# Altium PCB hiiri627v07.PcbDoc (part 2 of 3)
Units mm, origin at the board's own origin, x right, y up, seen from the top; angles counter-clockwise.
Board outline 78.49 x 90.04 mm, 2 copper layers (Top, Bottom); 69 components, 154 nets, 484 pads, 208 vias.
Unrouted connection lines stored in the file: 5.
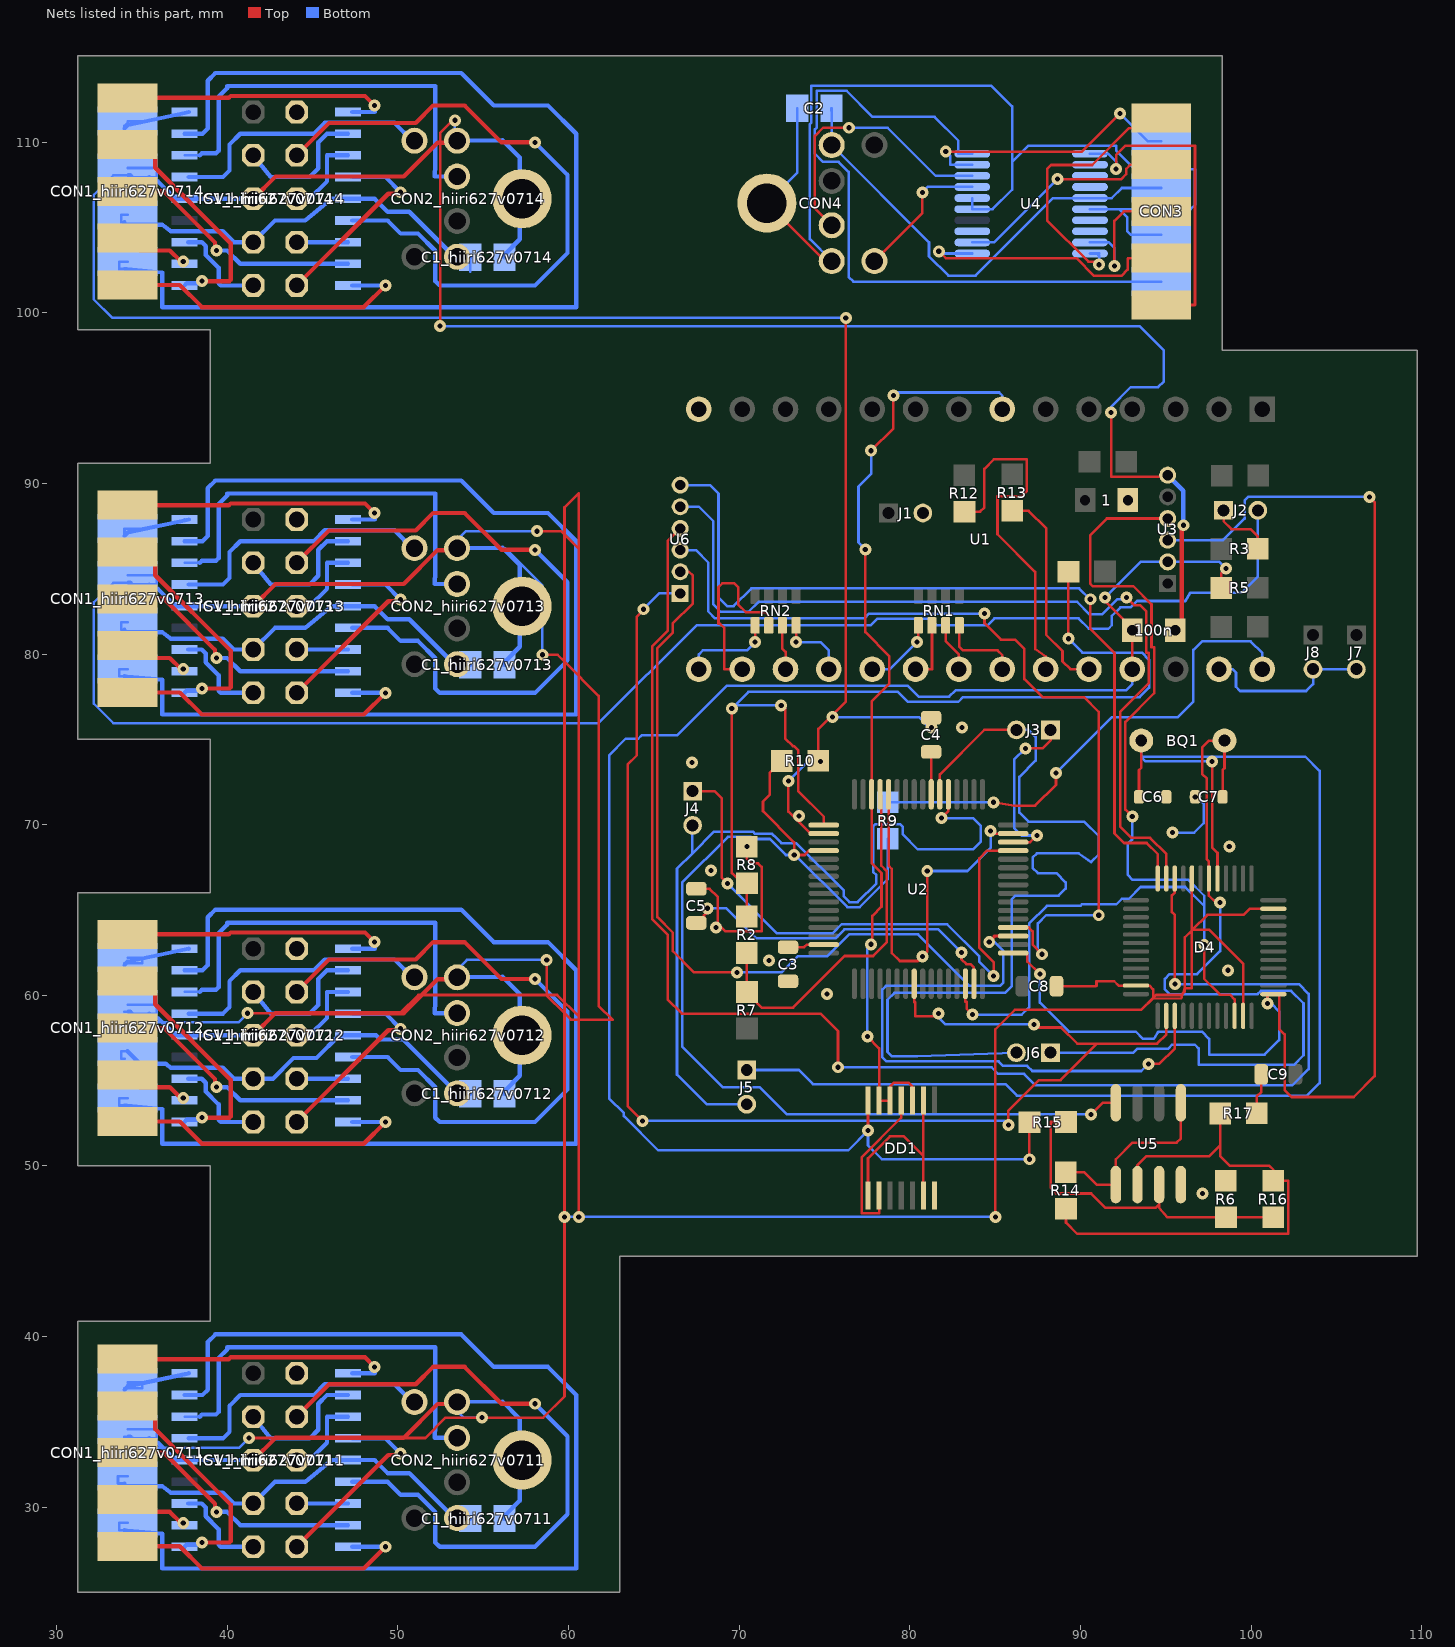
[diagram p2: the nets of this part, all layers, seen from the top]

## Via types
v1: diameter 0.7, hole 0.3, Top to Bottom, tented both sides, 208 vias

## Nets (pads, with @x,y where several pads share a name; then routed paths per layer and width w, separated by ;. In a path a pad name is that pad's centre, name@x,y a point inside that pad or via, vN(x,y) a via of type N, cw(c..) or ccw(c..) an arc to the next point about the centre after c; other vN are vias at no path point) (continued)
GND: 1.1 100n.2 C1_hiiri627v0711.2 C1_hiiri627v0712.2 C1_hiiri627v0713.2 C1_hiiri627v0714.2 C2.2 C3.2 C4.1 C5.2 C6.2 C7.2 C8.2 CON1_hiiri627v0711.8 CON1_hiiri627v0712.8 CON1_hiiri627v0713.8 CON1_hiiri627v0714.8 CON2_hiiri627v0711.3 CON2_hiiri627v0711.G CON2_hiiri627v0712.3 CON2_hiiri627v0712.G CON2_hiiri627v0713.3 CON2_hiiri627v0713.G CON2_hiiri627v0714.3 CON2_hiiri627v0714.G CON3.8 CON4.3 CON4.G D4.8 D4.23 D4.35 D4.47 DD1.7 IC1_hiiri627v0711.5 IC1_hiiri627v0712.5 IC1_hiiri627v0713.5 IC1_hiiri627v0714.5 J1.2 J2.2 R6.2 R8.1 R10.2 SV1_hiiri627v0711.6 SV1_hiiri627v0712.6 SV1_hiiri627v0713.6 SV1_hiiri627v0714.6 U1.14 U2.12 U2.18 U2.63 U3.6 U4.5 U4.6 U4.16 U5.4 | length 801.2
  Top w0.15: v1(41.199,58.953) 50.14,58.953 51.206,60.02 59.334,60.02 60.604,58.75 ; v1(41.275,34.061) 51.613,34.061 52.807,35.255 v1(54.94,35.255) 58.522,35.255 59.766,36.5 ; v1(52.476,99.212) 52.476,109.968 52.476,110.541 53.213,111.277 v1(53.349,111.277) ; v1(58.166,87.198) 59.563,87.198 60.604,86.157 ; v1(58.471,79.959) 59.36,79.959 59.766,79.553 ; v1(58.725,62.078) 58.725,59.995 59.766,58.953 ; v1(59.766,47.015) 59.766,36.5 ; v1(60.604,47.015) 60.604,58.75 ; C5.2@67.495,66.243 68.275,66.243 68.737,65.781 68.737,64.211 69.194,63.754 71.323,63.754 71.323,67.528 71.12,67.731 70.714,67.731 70.453,67.992 v1(70.453,68.714) ; CON4.G@71.628,106.426 75.028,103.026 CON4.3@75.428,103.026 ; v1(72.885,72.568) 72.885,70.771 74.18,69.477 U2.18@74.96,69.477 ; R10.2@74.644,73.742 74.644,75.609 v1@75.475,76.44 ; v1(75.475,76.302) v1@75.475,76.44 ; v1(76.251,99.695) 76.251,77.216 v1@75.475,76.44 ; U2.12@78.76,71.777 78.76,67.598 78.945,67.413 78.945,62.482 79.416,62.011 80.476,62.011 v1(80.747,62.281) 81.026,62.56 v1(81.026,67.285) ; C4.1@81.248,76.266 81.28,76.235 v1(81.28,75.692) ; v1(84.734,69.621) 84.734,69.477 U2.63@86.06,69.477 ; v1(85.014,47.015) 85.014,58.014 86.157,59.157 93.574,59.157 ; C8.2@88.598,60.534 90.907,60.534 90.943,60.571 90.943,60.825 91.983,60.825 92.238,60.571 D4.23@93.257,60.571 94.039,60.571 94.259,60.35 94.259,59.842 ; v1(91.796,94.158) 91.796,90.399 95.113,90.399 U3.6@95.113,90.482 ; D4.8@96.532,66.845 96.526,63.811 ; D4.35@99.532,58.796 99.532,61.86 97.536,63.856 96.571,63.856 ; D4.47@101.307,65.07 99.919,65.07 99.568,64.719 97.434,64.719 96.571,63.856 ; 59.766,36.5 59.766,58.953 ; 59.766,58.953 59.766,79.553 ; 59.766,58.953 60.147,58.572 62.586,58.572 61.773,59.385 61.773,77.546 59.766,79.553 ; 59.766,79.553 59.766,88.595 60.604,89.433 60.604,86.157 ; 60.604,58.75 60.604,86.157 ; 93.574,59.157 94.259,59.842 ; 93.574,59.157 94.246,59.804 ; 94.246,59.804 94.259,59.817 94.259,59.842 ; 94.246,59.804 95.91,59.817 96.012,60.122 ; 94.259,59.842 94.437,60.02 95.91,60.02 96.012,60.122 ; 96.012,60.122 96.114,60.427 ; 96.012,60.122 96.114,60.223 96.114,60.427 ; 96.114,60.427 96.114,63.398 96.526,63.811 ; 96.114,60.427 96.52,60.427 96.526,63.811 ; 96.526,63.811 96.571,63.856
  Top w0.254: SV1_hiiri627v0711.6@41.529,32.766 42.829,34.066 50.345,34.066 52.333,36.054 53.363,36.054 CON2_hiiri627v0711.3@53.476,36.166 ; SV1_hiiri627v0712.6@41.529,57.658 42.829,58.958 50.345,58.958 52.333,60.946 53.363,60.946 CON2_hiiri627v0712.3@53.476,61.058 ; SV1_hiiri627v0713.6@41.529,82.804 42.829,84.104 50.345,84.104 52.333,86.092 53.363,86.092 CON2_hiiri627v0713.3@53.476,86.204 ; SV1_hiiri627v0714.6@41.529,106.68 42.829,107.98 50.345,107.98 52.333,109.968 52.476,109.968 53.363,109.968 CON2_hiiri627v0714.3@53.476,110.08 ; 100n.2@95.555,81.397 95.936,81.778 95.936,87.451 v1(96.031,87.547)
  Bottom w0.15: CON1_hiiri627v0712.8@33.985,59.03 34.164,59.03 CON1_hiiri627v0712.8@34.214,59.03 ; CON1_hiiri627v0711.8@34.164,34.569 35.865,34.569 35.865,34.036 35.433,34.036 34.417,34.036 34.315,34.036 34.214,34.138 34.164,34.138 33.985,34.138 33.985,33.909 34.417,33.477 40.691,33.477 v1(41.275,34.061) ; CON1_hiiri627v0712.8@34.164,59.461 35.865,59.461 35.865,58.928 35.433,58.928 34.417,58.928 34.315,58.928 CON1_hiiri627v0712.8@34.214,59.03 ; CON1_hiiri627v0713.8@34.164,84.607 35.865,84.607 35.865,84.074 35.433,84.074 34.417,84.074 34.315,84.074 34.214,84.176 34.164,84.176 33.985,84.176 33.325,84.176 32.182,83.033 32.182,77.089 33.325,75.946 61.773,75.946 67.511,81.685 77.711,81.685 78.098,82.072 81.204,82.072 81.591,81.685 84.555,81.685 84.963,82.093 89.887,82.093 90.496,81.483 91.634,81.483 91.837,81.686 91.837,82.237 92.338,82.737 92.948,82.737 93.318,83.107 96.138,83.107 96.429,83.603 99.467,83.603 100.395,84.531 J2.2@100.395,88.422 ; CON1_hiiri627v0714.8@34.164,108.483 35.865,108.483 35.865,107.95 35.433,107.95 34.417,107.95 34.315,107.95 34.214,108.052 34.164,108.052 33.985,108.052 33.325,108.052 32.182,106.909 32.182,100.787 33.274,99.695 v1(76.251,99.695) ; v1(41.199,58.953) 40.665,58.42 34.823,58.42 34.4,58.928 34.315,59.03 CON1_hiiri627v0712.8@34.214,59.03 ; v1(52.476,99.212) 93.472,99.212 94.885,97.799 94.885,95.976 94.548,95.639 92.95,95.639 91.796,94.485 v1(91.796,94.158) ; CON2_hiiri627v0711.3@53.349,36.166 53.349,35.763 53.857,35.255 v1(54.94,35.255) ; CON2_hiiri627v0712.3@53.349,61.058 53.349,61.375 54.051,62.078 v1(58.725,62.078) ; CON2_hiiri627v0714.3@53.349,110.08 v1(53.349,111.277) ; v1(58.166,87.198) 53.984,87.198 53.349,86.563 53.349,86.204 CON2_hiiri627v0713.3@53.476,86.204 53.877,86.204 56.163,86.204 56.29,86.204 58.471,84.023 v1(58.471,79.959) ; v1(59.766,47.015) v1(60.604,47.015) v1(85.014,47.015) ; CON4.G@71.628,106.426 73.412,108.21 C2.2@73.412,111.984 ; v1(72.885,72.568) 74.028,73.711 v1(74.778,73.711) ; CON4.3@75.428,103.026 74.141,104.313 74.141,111.052 74.237,111.148 74.237,113.309 84.771,113.309 85.994,112.086 85.994,108.834 ; v1(75.475,76.302) 80.53,76.302 81.14,75.692 v1(81.28,75.692) ; v1(81.026,67.285) 83.381,67.285 84.734,68.638 v1(84.734,69.621) ; U4.6@83.662,106.721 83.658,106.721 83.658,106.071 U4.5@83.662,106.071 84.857,106.071 85.994,107.209 85.994,108.834 ; U4.16@90.562,106.071 92.263,106.071 ; CON3.8@94.732,104.567 92.954,104.567 92.751,104.77 92.751,105.583 92.263,106.071 ; v1(95.405,69.54) 96.67,69.54 97.228,70.099 97.228,71.226 96.826,71.628 v1(96.732,71.628) ; 85.994,108.834 86.934,109.774 92.097,109.774 92.097,109.514 93.208,108.403 96.713,108.403 96.713,106.325 96.459,106.071 92.263,106.071
  Bottom w0.254: CON1_hiiri627v0711.8@34.214,34.138 34.315,34.138 CON1_hiiri627v0711.8@34.417,34.036 ; CON1_hiiri627v0712.8@34.214,59.03 34.315,59.03 CON1_hiiri627v0712.8@34.417,58.928 ; CON1_hiiri627v0713.8@34.214,84.176 34.315,84.176 CON1_hiiri627v0713.8@34.417,84.074 ; CON1_hiiri627v0714.8@34.214,108.052 34.315,108.052 CON1_hiiri627v0714.8@34.417,107.95 ; CON1_hiiri627v0711.8@35.433,34.036 35.687,33.782 35.941,33.782 36.957,32.766 IC1_hiiri627v0711.5@37.503,32.766 SV1_hiiri627v0711.6@41.529,32.766 ; CON1_hiiri627v0712.8@35.433,58.928 35.687,58.674 35.941,58.674 36.957,57.658 IC1_hiiri627v0712.5@37.503,57.658 SV1_hiiri627v0712.6@41.529,57.658 ; CON1_hiiri627v0713.8@35.433,84.074 35.687,83.82 35.941,83.82 36.957,82.804 IC1_hiiri627v0713.5@37.503,82.804 SV1_hiiri627v0713.6@41.529,82.804 ; CON1_hiiri627v0714.8@35.433,107.95 35.687,107.696 35.941,107.696 36.957,106.68 IC1_hiiri627v0714.5@37.503,106.68 SV1_hiiri627v0714.6@41.529,106.68 ; CON2_hiiri627v0711.3@53.349,36.166 CON2_hiiri627v0711.3@53.476,36.166 53.877,36.166 56.134,36.195 57.149,35.18 57.149,30.391 56.245,29.487 C1_hiiri627v0711.2@56.245,29.337 ; CON2_hiiri627v0712.3@53.349,61.058 CON2_hiiri627v0712.3@53.476,61.058 53.877,61.058 56.134,61.087 57.149,60.072 57.149,55.283 56.245,54.379 C1_hiiri627v0712.2@56.245,54.229 ; CON2_hiiri627v0714.3@53.349,110.08 CON2_hiiri627v0714.3@53.476,110.08 53.877,110.08 56.134,110.109 57.149,109.094 57.149,104.305 56.245,103.401 C1_hiiri627v0714.2@56.245,103.251 ; CON2_hiiri627v0713.3@53.877,86.204 56.134,86.233 56.163,86.204 57.149,85.218 57.149,80.429 56.245,79.525 C1_hiiri627v0713.2@56.245,79.375 ; U3.6@95.113,90.482 96.031,89.563 v1(96.031,87.547)
  other v1: 97.159,48.387 75.144,60.07 98.65,61.467 71.762,62.036 68.656,63.977 68.363,67.305 98.725,68.728 73.507,70.51 67.248,73.645 83.058,75.692
H: CON3.2 U4.2 | length 13.1
  Top w0.15: v1(88.647,107.83) 92.395,107.83 92.687,108.122 92.687,108.428 92.941,108.682 CON3.2@94.732,108.682
  Bottom w0.15: U4.2@83.662,104.121 84.937,104.121 v1(88.647,107.83)
H_hiiri627v0711: CON1_hiiri627v0711.2 IC1_hiiri627v0711.2 | length 5
  Top w0.15: CON1_hiiri627v0711.2@33.985,30.023 33.985,30.454 CON1_hiiri627v0711.2@34.163,30.454
  Top w0.254: CON1_hiiri627v0711.2@33.985,30.023 CON1_hiiri627v0711.2@34.366,30.023 ; CON1_hiiri627v0711.2@34.163,30.454 34.886,29.731 36.638,29.731 37.287,29.083 v1(37.427,29.083)
  Bottom w0.254: v1(37.427,29.083) 37.503,29.007 IC1_hiiri627v0711.2@37.503,28.956 IC1_hiiri627v0711.2@37.465,28.956
H_hiiri627v0712: CON1_hiiri627v0712.2 IC1_hiiri627v0712.2 | length 5
  Top w0.15: CON1_hiiri627v0712.2@33.985,54.915 33.985,55.346 CON1_hiiri627v0712.2@34.163,55.346
  Top w0.254: CON1_hiiri627v0712.2@33.985,54.915 CON1_hiiri627v0712.2@34.366,54.915 ; CON1_hiiri627v0712.2@34.163,55.346 34.886,54.623 36.638,54.623 37.287,53.975 v1(37.427,53.975)
  Bottom w0.254: v1(37.427,53.975) 37.503,53.899 IC1_hiiri627v0712.2@37.503,53.848 IC1_hiiri627v0712.2@37.465,53.848
H_hiiri627v0713: CON1_hiiri627v0713.2 IC1_hiiri627v0713.2 | length 5
  Top w0.15: CON1_hiiri627v0713.2@33.985,80.061 33.985,80.492 CON1_hiiri627v0713.2@34.163,80.492
  Top w0.254: CON1_hiiri627v0713.2@33.985,80.061 CON1_hiiri627v0713.2@34.366,80.061 ; CON1_hiiri627v0713.2@34.163,80.492 34.886,79.769 36.638,79.769 37.287,79.121 v1(37.427,79.121)
  Bottom w0.254: v1(37.427,79.121) 37.503,79.045 IC1_hiiri627v0713.2@37.503,78.994 IC1_hiiri627v0713.2@37.465,78.994
H_hiiri627v0714: CON1_hiiri627v0714.2 IC1_hiiri627v0714.2 | length 5
  Top w0.15: CON1_hiiri627v0714.2@33.985,103.937 33.985,104.368 CON1_hiiri627v0714.2@34.163,104.368
  Top w0.254: CON1_hiiri627v0714.2@33.985,103.937 CON1_hiiri627v0714.2@34.366,103.937 ; CON1_hiiri627v0714.2@34.163,104.368 34.886,103.645 36.638,103.645 37.287,102.997 v1(37.427,102.997)
  Bottom w0.254: v1(37.427,102.997) 37.503,102.921 IC1_hiiri627v0714.2@37.503,102.87 IC1_hiiri627v0714.2@37.465,102.87
HQ: CON3.4 U4.1 | length 16.4
  Top w0.15: v1(81.702,103.602) 82.109,103.195 89.769,103.195 90.801,102.163 92.395,102.163 92.767,102.535 92.767,103.161 92.802,103.195 CON3.4@94.732,103.195
  Bottom w0.15: v1(81.702,103.602) 81.833,103.471 U4.1@83.662,103.471
HQ_hiiri627v0711: CON1_hiiri627v0711.4 IC1_hiiri627v0711.1 | length 13.8
  Top w0.254: CON1_hiiri627v0711.4@34.163,35.941 35.063,35.941 35.786,35.218 35.786,34.581 40.203,30.165 40.203,28.011 40.132,27.94 v1(38.519,27.94)
  Bottom w0.254: IC1_hiiri627v0711.1@37.503,27.686 37.63,27.813 38.392,27.813 v1(38.519,27.94)
HQ_hiiri627v0712: CON1_hiiri627v0712.4 IC1_hiiri627v0712.1 | length 13.8
  Top w0.254: CON1_hiiri627v0712.4@34.163,60.833 35.063,60.833 35.786,60.11 35.786,59.473 40.203,55.057 40.203,52.903 40.132,52.832 v1(38.519,52.832)
  Bottom w0.254: IC1_hiiri627v0712.1@37.503,52.578 37.63,52.705 38.392,52.705 v1(38.519,52.832)
HQ_hiiri627v0713: CON1_hiiri627v0713.4 IC1_hiiri627v0713.1 | length 13.8
  Top w0.254: CON1_hiiri627v0713.4@34.163,85.979 35.063,85.979 35.786,85.256 35.786,84.619 40.203,80.203 40.203,78.049 40.132,77.978 v1(38.519,77.978)
  Bottom w0.254: IC1_hiiri627v0713.1@37.503,77.724 37.63,77.851 38.392,77.851 v1(38.519,77.978)
HQ_hiiri627v0714: CON1_hiiri627v0714.4 IC1_hiiri627v0714.1 | length 13.8
  Top w0.254: CON1_hiiri627v0714.4@34.163,109.855 35.063,109.855 35.786,109.132 35.786,108.495 40.203,104.079 40.203,101.925 40.132,101.854 v1(38.519,101.854)
  Bottom w0.254: IC1_hiiri627v0714.1@37.503,101.6 37.63,101.727 38.392,101.727 v1(38.519,101.854)
LEFTMB/FIRE: CON3.6 U4.9 | length 16.4
  Top w0.15: v1(82.108,109.444) 90.084,109.444 v1(92.319,111.679)
  Bottom w0.15: v1(82.108,109.444) 82.362,109.19 82.362,108.671 U4.9@83.662,108.671 ; v1(92.319,111.679) 93.945,110.053 CON3.6@94.732,110.053
LEFTMB/FIRE_hiiri627v0711: CON1_hiiri627v0711.6 IC1_hiiri627v0711.8 | length 67.4
  Bottom w0.15: CON1_hiiri627v0711.6@33.985,28.651 33.68,28.651 33.68,29.083 CON1_hiiri627v0711.6@34.164,29.083
  Bottom w0.254: CON1_hiiri627v0711.6@33.985,28.651 34.123,28.639 36.195,28.448 36.195,26.416 60.452,26.416 60.452,36.576 58.801,38.227 55.626,38.227 53.721,40.132 39.31,40.132 38.862,39.684 38.862,36.881 38.557,36.576 IC1_hiiri627v0711.8@37.503,36.576
LEFTMB/FIRE_hiiri627v0712: CON1_hiiri627v0712.6 IC1_hiiri627v0712.8 | length 67.4
  Bottom w0.15: CON1_hiiri627v0712.6@33.985,53.543 33.68,53.543 33.68,53.975 CON1_hiiri627v0712.6@34.164,53.975
  Bottom w0.254: CON1_hiiri627v0712.6@33.985,53.543 34.123,53.531 36.195,53.34 36.195,51.308 60.452,51.308 60.452,61.468 58.801,63.119 55.626,63.119 53.721,65.024 39.31,65.024 38.862,64.576 38.862,61.773 38.557,61.468 IC1_hiiri627v0712.8@37.503,61.468
LEFTMB/FIRE_hiiri627v0713: CON1_hiiri627v0713.6 IC1_hiiri627v0713.8 | length 67.4
  Bottom w0.15: CON1_hiiri627v0713.6@33.985,78.689 33.68,78.689 33.68,79.121 CON1_hiiri627v0713.6@34.164,79.121
  Bottom w0.254: CON1_hiiri627v0713.6@33.985,78.689 34.123,78.677 36.195,78.486 36.195,76.454 60.452,76.454 60.452,86.614 58.801,88.265 55.626,88.265 53.721,90.17 39.31,90.17 38.862,89.722 38.862,86.919 38.557,86.614 IC1_hiiri627v0713.8@37.503,86.614
LEFTMB/FIRE_hiiri627v0714: CON1_hiiri627v0714.6 IC1_hiiri627v0714.8 | length 67.4
  Bottom w0.15: CON1_hiiri627v0714.6@33.985,102.565 33.68,102.565 33.68,102.997 CON1_hiiri627v0714.6@34.164,102.997
  Bottom w0.254: CON1_hiiri627v0714.6@33.985,102.565 34.123,102.553 36.195,102.362 36.195,100.33 60.452,100.33 60.452,110.49 58.801,112.141 55.626,112.141 53.721,114.046 39.31,114.046 38.862,113.598 38.862,110.795 38.557,110.49 IC1_hiiri627v0714.8@37.503,110.49
LMBFIRE2: U4.3
LMBFIRE2_hiiri627v0711: IC1_hiiri627v0711.3 SV1_hiiri627v0711.2 | length 5.7
  Bottom w0.254: IC1_hiiri627v0711.3@37.719,30.226 38.508,30.226 38.743,29.991 38.743,29.471 39.497,28.717 39.497,27.813 39.624,27.686 SV1_hiiri627v0711.2@41.529,27.686
LMBFIRE2_hiiri627v0712: IC1_hiiri627v0712.3 SV1_hiiri627v0712.2 | length 5.7
  Bottom w0.254: IC1_hiiri627v0712.3@37.719,55.118 38.508,55.118 38.743,54.883 38.743,54.363 39.497,53.609 39.497,52.705 39.624,52.578 SV1_hiiri627v0712.2@41.529,52.578
LMBFIRE2_hiiri627v0713: IC1_hiiri627v0713.3 SV1_hiiri627v0713.2 | length 5.7
  Bottom w0.254: IC1_hiiri627v0713.3@37.719,80.264 38.508,80.264 38.743,80.029 38.743,79.509 39.497,78.755 39.497,77.851 39.624,77.724 SV1_hiiri627v0713.2@41.529,77.724
LMBFIRE2_hiiri627v0714: IC1_hiiri627v0714.3 SV1_hiiri627v0714.2 | length 5.7
  Bottom w0.254: IC1_hiiri627v0714.3@37.719,104.14 38.508,104.14 38.743,103.905 38.743,103.385 39.497,102.631 39.497,101.727 39.624,101.6 SV1_hiiri627v0714.2@41.529,101.6
MIDDLEMB/POTX: CON3.5 U4.11 | length 19.1
  Top w0.15: v1(92.09,108.428) 92.09,109.241 92.624,109.774 96.713,109.774 96.713,100.452 CON3.5@94.732,100.452
  Bottom w0.15: U4.11@90.562,109.321 91.629,109.321 92.09,108.86 v1(92.09,108.428)
MIDDLEMB/POTX_hiiri627v0711: CON1_hiiri627v0711.5 IC1_hiiri627v0711.10 | length 16.4
  Top w0.254: CON1_hiiri627v0711.5@34.163,38.684 40.099,38.684 40.203,38.787 48.081,38.787 v1(48.641,38.227)
  Bottom w0.254: IC1_hiiri627v0711.10@47.333,37.846 48.641,37.846 v1(48.641,38.227)
MIDDLEMB/POTX_hiiri627v0712: CON1_hiiri627v0712.5 IC1_hiiri627v0712.10 | length 16.4
  Top w0.254: CON1_hiiri627v0712.5@34.163,63.576 40.099,63.576 40.203,63.679 48.081,63.679 v1(48.641,63.119)
  Bottom w0.254: IC1_hiiri627v0712.10@47.333,62.738 48.641,62.738 v1(48.641,63.119)
MIDDLEMB/POTX_hiiri627v0713: CON1_hiiri627v0713.5 IC1_hiiri627v0713.10 | length 16.4
  Top w0.254: CON1_hiiri627v0713.5@34.163,88.722 40.099,88.722 40.203,88.825 48.081,88.825 v1(48.641,88.265)
  Bottom w0.254: IC1_hiiri627v0713.10@47.333,87.884 48.641,87.884 v1(48.641,88.265)
MIDDLEMB/POTX_hiiri627v0714: CON1_hiiri627v0714.5 IC1_hiiri627v0714.10 | length 16.4
  Top w0.254: CON1_hiiri627v0714.5@34.163,112.598 40.099,112.598 40.203,112.701 48.081,112.701 v1(48.641,112.141)
  Bottom w0.254: IC1_hiiri627v0714.10@47.333,111.76 48.641,111.76 v1(48.641,112.141)
Net_2: ?.2 R2.2 R8.2 U2.17 | length 60.1
  Top w0.15: v1(69.571,76.808) 69.571,67.171 69.899,66.843 69.899,66.572 R8.2@70.459,66.572 70.459,64.619 R2.2@70.447,64.619 ; v1(72.466,76.987) 72.695,76.987 72.695,75.057 73.152,74.6 73.227,74.6 73.46,74.367 73.46,71.969 74.96,70.469 U2.17@74.96,69.977 ; v1(89.298,80.899) ?.2@89.298,84.83
  Bottom w0.15: v1(69.571,76.808) v1@69.75,76.987 ; v1(72.466,76.987) v1@69.75,76.987 ; v1(89.298,80.899) 90.111,80.086 93.599,80.086 94.031,79.654 94.031,78.029 93.472,77.47 83.109,77.47 82.84,77.202 79.885,77.202 79.301,77.785 70.548,77.785 v1@69.75,76.987
NetC3_1: C3.1 U2.31 | length 2.2
  Top w0.15: C3.1@72.866,62.82 73.812,62.82 73.969,62.977 U2.31@74.96,62.977
NetC4_2: C4.2 U2.7 | length 2.5
  Top w0.15: C4.2@81.248,74.267 81.248,73.011 81.26,73 U2.7@81.26,71.777
NetC5_1: C5.1 U2.47 | length 19.9
  Top w0.15: C5.1@67.495,64.243 67.627,64.243 67.943,64.558 67.943,64.691 68.043,64.791 68.043,64.995 v1(68.148,65.1) ; v1(83.033,62.509) 83.033,62.103 83.312,61.824 83.566,61.824 83.76,61.63 U2.47@83.76,60.677
  Bottom w0.15: v1(68.148,65.1) 69.249,65.1 71.013,63.336 75.644,63.336 76.174,63.867 81.675,63.867 v1(83.033,62.509)
NetC9_1: C9.1 R17.1 | length 2.4
  Top w0.15: R17.1@100.33,53.086 100.33,54.077 100.6,54.347 C9.1@100.6,55.372
NetDD1_1: DD1.1 DD1.6 DD1.9 | length 12
  Top w0.15: DD1.1@77.552,48.279 77.552,50.45 78.842,51.74 79.654,51.74 80.802,50.592 ; DD1.6@80.802,48.279 80.802,50.592 ; DD1.9@80.802,53.829 80.802,50.592
NetDD1_2: DD1.2 DD1.11 | length 9.6
  Top w0.15: DD1.2@78.202,48.279 78.202,47.229 77.177,47.229 77.177,50.507 79.502,52.832 DD1.11@79.502,53.829
NetJ2_1: J2.1 R3.2 | length 3.7
  Top w0.15: J2.1@98.389,88.422 98.389,87.782 98.853,87.318 99.974,87.318 100.395,86.897 R3.2@100.395,86.164
NetJ3_1: J3.1 U2.62 | length 10.3
  Top w0.15: U2.62@86.06,68.977 87.062,68.977 v1(87.452,69.367) ; v1(86.785,74.473) 87.782,74.473 88.255,74.945 J3.1@88.255,75.555
  Bottom w0.15: v1(86.785,74.473) 86.12,73.807 86.12,69.811 86.563,69.367 v1(87.452,69.367)
NetJ3_2: J3.2 J6.2 U2.6 | length 53.6
  Top w0.15: U2.6@81.76,71.777 81.76,72.949 84.366,75.555 J3.2@86.248,75.555
  Bottom w0.15: J6.2@86.248,56.642 80.442,56.427 78.961,56.427 78.696,56.693 78.696,59.741 79.102,60.147 85.573,60.147 85.979,60.554 85.979,65.634 86.191,65.846 88.722,65.846 89.129,66.252 89.129,66.624 88.595,67.158 87.503,67.158 87.198,67.462 87.198,68.072 87.443,68.317 89.9,68.317 90.627,67.802 91.075,68.25 91.075,69.326 90.221,70.18 86.953,70.18 86.42,70.714 86.42,72.796 87.376,73.752 87.376,75.149 86.97,75.555 J3.2@86.248,75.555
NetJ4_1: J4.1 U2.61 | length 34.9
  Top w0.15: J4.1@67.278,71.964 68.548,71.964 68.986,71.526 68.986,66.878 v1(69.317,66.548) ; v1(84.912,61.138) 84.912,61.949 84.083,62.778 84.083,68.029 84.531,68.477 U2.61@86.06,68.477
  Bottom w0.15: v1(69.317,66.548) 72.228,63.636 75.475,63.636 76.005,64.167 82.188,64.167 84.083,62.272 84.083,61.967 v1(84.912,61.138)
NetJ4_2: J4.2 J5.2 U2.5 | length 49.3
  Top w0.15: v1(81.864,70.383) 81.864,70.402 82.26,70.798 U2.5@82.26,71.777
  Bottom w0.15: J4.2@67.278,69.958 67.259,69.958 67.259,68.325 ; J5.2@70.447,53.619 68.097,53.619 66.359,55.358 66.359,67.425 67.259,68.325 ; v1(81.864,70.383) 83.718,70.383 84.159,69.943 84.159,68.995 83.718,68.555 80.467,68.555 79.578,69.444 79.578,69.889 79.436,70.031 77.98,70.031 77.848,69.899 77.848,67.237 78.045,67.04 78.045,66.564 76.946,65.465 76.47,65.465 76.133,65.802 76.133,66.133 73.342,68.924 72.478,68.924 72.061,69.341 72.053,69.341 71.932,69.462 70.942,69.462 70.815,69.589 68.523,69.589 67.259,68.325
NetJ7_2: J7.2 J8.2 U1.27 | length 10.1
  Bottom w0.15: U1.27@98.12,79.111 98.918,79.111 99.117,78.911 99.117,78.084 99.365,77.836 103.226,77.836 103.632,78.242 J8.2@103.632,79.111 J7.2@106.172,79.111
NetR6_1: R6.1 R15.2 R16.1 U5.3 | length 20
  Top w0.15: R15.2@89.154,52.578 88.265,52.578 88.265,48.717 88.595,48.387 90.627,48.387 91.465,47.549 94.412,47.549 94.615,47.752 ; U5.3@94.615,48.908 94.615,47.752 ; R16.1@101.307,46.99 R6.1@98.532,46.99 95.098,46.99 94.615,47.549 94.615,47.752
NetR9_1: R9.1 U1.28 | length 29.4
  Top w0.15: v1(84.912,71.313) 86.131,71.12 87.351,71.12 88.57,72.339 v1(88.57,73.025)
  Bottom w0.15: R9.1@78.714,71.313 v1(84.912,71.313) ; v1(88.57,73.025) 91.846,76.302 95.707,76.302 96.622,77.216 96.622,80.239 97.13,80.747 99.974,80.747 100.66,80.061 U1.28@100.66,79.111
NetR14_1: R14.1 R16.2 R17.2 U5.2 | length 31.2
  Top w0.15: R14.1@89.154,47.498 89.154,46.685 89.814,46.025 102.184,46.025 102.184,49.132 R16.2@101.301,49.132 101.301,49.784 101.072,50.013 98.755,50.013 98.188,50.58 98.188,51.206 ; U5.2@93.345,48.908 93.345,50.047 93.878,50.581 97.562,50.581 98.188,51.206 ; R17.2@98.188,53.08 98.188,51.206
NetR14_2: R14.2 U5.1 U5.5 | length 11.1
  Top w0.15: R14.2@89.148,49.64 90.221,49.64 90.953,48.908 U5.1@92.075,48.908 92.075,50.394 93.049,51.368 95.64,51.368 95.885,51.613 U5.5@95.885,53.708
OSC1: U4.18
OSC1_hiiri627v0711: IC1_hiiri627v0711.16 SV1_hiiri627v0711.3 | length 3
  Bottom w0.254: SV1_hiiri627v0711.3@44.069,30.226 IC1_hiiri627v0711.16@47.079,30.226
OSC1_hiiri627v0712: IC1_hiiri627v0712.16 SV1_hiiri627v0712.3 | length 3
  Bottom w0.254: SV1_hiiri627v0712.3@44.069,55.118 IC1_hiiri627v0712.16@47.079,55.118
OSC1_hiiri627v0713: IC1_hiiri627v0713.16 SV1_hiiri627v0713.3 | length 3
  Bottom w0.254: SV1_hiiri627v0713.3@44.069,80.264 IC1_hiiri627v0713.16@47.079,80.264
OSC1_hiiri627v0714: IC1_hiiri627v0714.16 SV1_hiiri627v0714.3 | length 3
  Bottom w0.254: SV1_hiiri627v0714.3@44.069,104.14 IC1_hiiri627v0714.16@47.079,104.14
OSC2: U4.17
OSC2_hiiri627v0711: IC1_hiiri627v0711.15 SV1_hiiri627v0711.7 | length 39.4
  Top w0.254: SV1_hiiri627v0711.7@44.069,35.306 45.968,37.205 51.048,37.205 52.07,38.227 53.915,38.227 56.074,36.068 v1(58.039,36.068)
  Bottom w0.254: IC1_hiiri627v0711.15@47.333,31.496 49.403,31.496 50.165,30.734 51.181,30.734 52.197,29.718 52.197,27.94 52.451,27.686 58.039,27.686 59.944,29.591 59.944,34.163 v1(58.039,36.068)
OSC2_hiiri627v0712: IC1_hiiri627v0712.15 SV1_hiiri627v0712.7 | length 39.4
  Top w0.254: SV1_hiiri627v0712.7@44.069,60.198 45.968,62.097 51.048,62.097 52.07,63.119 53.915,63.119 56.074,60.96 v1(58.039,60.96)
  Bottom w0.254: IC1_hiiri627v0712.15@47.333,56.388 49.403,56.388 50.165,55.626 51.181,55.626 52.197,54.61 52.197,52.832 52.451,52.578 58.039,52.578 59.944,54.483 59.944,59.055 v1(58.039,60.96)
OSC2_hiiri627v0713: IC1_hiiri627v0713.15 SV1_hiiri627v0713.7 | length 39.4
  Top w0.254: SV1_hiiri627v0713.7@44.069,85.344 45.968,87.243 51.048,87.243 52.07,88.265 53.915,88.265 56.074,86.106 v1(58.039,86.106)
  Bottom w0.254: IC1_hiiri627v0713.15@47.333,81.534 49.403,81.534 50.165,80.772 51.181,80.772 52.197,79.756 52.197,77.978 52.451,77.724 58.039,77.724 59.944,79.629 59.944,84.201 v1(58.039,86.106)
OSC2_hiiri627v0714: IC1_hiiri627v0714.15 SV1_hiiri627v0714.7 | length 39.4
  Top w0.254: SV1_hiiri627v0714.7@44.069,109.22 45.968,111.119 51.048,111.119 52.07,112.141 53.915,112.141 56.074,109.982 v1(58.039,109.982)
  Bottom w0.254: IC1_hiiri627v0714.15@47.333,105.41 49.403,105.41 50.165,104.648 51.181,104.648 52.197,103.632 52.197,101.854 52.451,101.6 58.039,101.6 59.944,103.505 59.944,108.077 v1(58.039,109.982)
OSC_I: BQ1.1 C6.1 D4.5 J5.1 | length 79.2
  Top w0.15: C6.1@93.434,71.628 93.434,73.203 93.565,73.333 BQ1.1@93.565,74.93 ; v1(97.714,73.711) 97.714,68.67 98.032,68.351 D4.5@98.032,66.845
  Bottom w0.15: J5.1@70.447,55.626 73.496,55.626 74.32,54.802 85.599,54.802 86.28,54.121 103.27,54.121 104.013,54.864 104.013,73.152 103.175,73.99 93.565,73.99 ; BQ1.1@93.565,74.93 93.565,73.99 ; v1(97.714,73.711) 93.819,73.711 93.565,73.965 93.565,73.99
OSC_O: BQ1.2 C7.1 D4.6 J6.1 | length 49.8
  Top w0.15: v1(98.185,65.43) 97.938,65.43 97.532,65.837 D4.6@97.532,66.845 97.532,67.843 97.409,67.966 97.409,72.695 97.13,72.974 97.13,74.524 97.536,74.93 BQ1.2@98.445,74.93 98.445,73.315 98.332,73.203 C7.1@98.332,71.628
  Bottom w0.15: J6.1@88.255,56.642 93.105,56.642 93.327,56.864 95.123,56.864 95.364,57.105 96.713,57.105 96.922,56.896 96.922,55.924 102.506,55.924 103.071,56.49 103.071,59.538 102.343,60.266 100.581,60.266 100.386,60.071 95.225,60.071 94.945,60.35 94.945,60.96 95.225,61.239 96.839,61.239 98.185,62.586 v1(98.185,65.43)
POTX: R13.1 U1.24 | length 12.3
  Top w0.15: R13.1@86.006,88.392 86.97,88.392 87.986,87.376 87.986,81.131 88.951,80.166 88.951,79.568 89.408,79.111 U1.24@90.5,79.111
POTY: R12.1 U1.23 | length 21.3
  Top w0.15: R12.1@83.206,88.34 84.125,88.34 84.374,88.589 84.374,90.851 84.938,91.415 86.868,91.415 86.868,89.56 86.563,89.256 85.141,89.256 85.141,87.02 87.351,84.811 87.351,80.289 87.96,79.858 U1.23@87.96,79.111
PS2CLOCK: CON4.5 U4.7 | length 8.2
  Top w0.15: CON4.5@77.928,103.026 80.737,105.835 v1(80.737,107.056)
  Bottom w0.15: v1(80.737,107.056) 81.051,107.371 U4.7@83.662,107.371
PS2CLOCK_hiiri627v0711: CON2_hiiri627v0711.5 IC1_hiiri627v0711.6 | length 15.9
  Bottom w0.15: CON2_hiiri627v0711.5@50.849,36.244 50.849,36.166 CON2_hiiri627v0711.5@50.976,36.166
  Bottom w0.254: IC1_hiiri627v0711.6@37.757,34.036 39.751,34.036 40.132,34.417 40.132,35.941 40.767,36.576 45.085,36.576 45.72,37.211 49.804,37.211 CON2_hiiri627v0711.5@50.849,36.166
PS2CLOCK_hiiri627v0712: CON2_hiiri627v0712.5 IC1_hiiri627v0712.6 | length 15.9
  Bottom w0.15: CON2_hiiri627v0712.5@50.849,61.136 50.849,61.058 CON2_hiiri627v0712.5@50.976,61.058
  Bottom w0.254: IC1_hiiri627v0712.6@37.757,58.928 39.751,58.928 40.132,59.309 40.132,60.833 40.767,61.468 45.085,61.468 45.72,62.103 49.804,62.103 CON2_hiiri627v0712.5@50.849,61.058
PS2CLOCK_hiiri627v0713: CON2_hiiri627v0713.5 IC1_hiiri627v0713.6 | length 15.9
  Bottom w0.15: CON2_hiiri627v0713.5@50.849,86.282 50.849,86.204 CON2_hiiri627v0713.5@50.976,86.204
  Bottom w0.254: IC1_hiiri627v0713.6@37.757,84.074 39.751,84.074 40.132,84.455 40.132,85.979 40.767,86.614 45.085,86.614 45.72,87.249 49.804,87.249 CON2_hiiri627v0713.5@50.849,86.204
PS2CLOCK_hiiri627v0714: CON2_hiiri627v0714.5 IC1_hiiri627v0714.6 | length 15.9
  Bottom w0.15: CON2_hiiri627v0714.5@50.849,110.158 50.849,110.08 CON2_hiiri627v0714.5@50.976,110.08
  Bottom w0.254: IC1_hiiri627v0714.6@37.757,107.95 39.751,107.95 40.132,108.331 40.132,109.855 40.767,110.49 45.085,110.49 45.72,111.125 49.804,111.125 CON2_hiiri627v0714.5@50.849,110.08
PS2DATA: CON4.1 U4.8 | length 16.2
  Top w0.15: CON4.1@75.428,105.126 74.437,106.117 74.437,110.358 74.92,110.841 v1(76.444,110.841)
  Bottom w0.15: v1(76.444,110.841) 78.704,110.841 81.524,108.021 U4.8@83.662,108.021
PS2DATA_hiiri627v0711: CON2_hiiri627v0711.1 IC1_hiiri627v0711.7 | length 24.9
  Bottom w0.15: IC1_hiiri627v0711.7@37.503,35.306 38.392,35.306 ; CON2_hiiri627v0711.1@53.349,34.066 CON2_hiiri627v0711.1@53.476,34.066
  Bottom w0.254: 38.392,35.306 38.519,35.433 39.348,35.433 39.497,35.582 39.497,38.743 40.005,39.251 40.005,39.37 52.197,39.37 52.197,34.798 52.167,34.066 CON2_hiiri627v0711.1@53.349,34.066
PS2DATA_hiiri627v0712: CON2_hiiri627v0712.1 IC1_hiiri627v0712.7 | length 24.9
  Bottom w0.15: IC1_hiiri627v0712.7@37.503,60.198 38.392,60.198 ; CON2_hiiri627v0712.1@53.349,58.958 CON2_hiiri627v0712.1@53.476,58.958
  Bottom w0.254: 38.392,60.198 38.519,60.325 39.348,60.325 39.497,60.474 39.497,63.635 40.005,64.143 40.005,64.262 52.197,64.262 52.197,59.69 52.167,58.958 CON2_hiiri627v0712.1@53.349,58.958
PS2DATA_hiiri627v0713: CON2_hiiri627v0713.1 IC1_hiiri627v0713.7 | length 24.9
  Bottom w0.15: IC1_hiiri627v0713.7@37.503,85.344 38.392,85.344 ; CON2_hiiri627v0713.1@53.349,84.104 CON2_hiiri627v0713.1@53.476,84.104
  Bottom w0.254: 38.392,85.344 38.519,85.471 39.348,85.471 39.497,85.62 39.497,88.781 40.005,89.289 40.005,89.408 52.197,89.408 52.197,84.836 52.167,84.104 CON2_hiiri627v0713.1@53.349,84.104
PS2DATA_hiiri627v0714: CON2_hiiri627v0714.1 IC1_hiiri627v0714.7 | length 24.9
  Bottom w0.15: IC1_hiiri627v0714.7@37.503,109.22 38.392,109.22 ; CON2_hiiri627v0714.1@53.349,107.98 CON2_hiiri627v0714.1@53.476,107.98
  Bottom w0.254: 38.392,109.22 38.519,109.347 39.348,109.347 39.497,109.496 39.497,112.657 40.005,113.165 40.005,113.284 52.197,113.284 52.197,108.712 52.167,107.98 CON2_hiiri627v0714.1@53.349,107.98
RIGHTMB/POTY: CON3.9 U4.10 | length 41.8
  Bottom w0.15: U4.10@83.662,109.321 82.845,109.321 82.845,110.079 81.448,111.476 77.825,111.476 76.292,113.009 74.537,113.009 74.537,110.835 74.441,110.739 74.441,109.318 74.92,108.839 75.83,108.839 76.419,108.25 76.419,102.103 76.698,101.824 CON3.9@94.732,101.824
RIGHTMB/POTY_hiiri627v0711: CON1_hiiri627v0711.9 IC1_hiiri627v0711.9 | length 6.3
  Bottom w0.15: CON1_hiiri627v0711.9@33.985,36.881 33.985,36.982 34.074,36.982 35.027,36.982 35.027,37.267 35.027,37.312 CON1_hiiri627v0711.9@34.164,37.312
  Bottom w0.254: CON1_hiiri627v0711.9@33.985,36.881 34.074,36.982 34.163,37.084 34.21,37.094 35.027,37.267 37.514,37.794 IC1_hiiri627v0711.9@37.757,37.846
RIGHTMB/POTY_hiiri627v0712: CON1_hiiri627v0712.9 IC1_hiiri627v0712.9 | length 6.3
  Bottom w0.15: CON1_hiiri627v0712.9@33.985,61.773 33.985,61.874 34.074,61.874 35.027,61.874 35.027,62.159 35.027,62.204 CON1_hiiri627v0712.9@34.164,62.204
  Bottom w0.254: CON1_hiiri627v0712.9@33.985,61.773 34.074,61.874 34.163,61.976 34.21,61.986 35.027,62.159 37.514,62.686 IC1_hiiri627v0712.9@37.757,62.738
RIGHTMB/POTY_hiiri627v0713: CON1_hiiri627v0713.9 IC1_hiiri627v0713.9 | length 6.3
  Bottom w0.15: CON1_hiiri627v0713.9@33.985,86.919 33.985,87.351 35.027,87.351 CON1_hiiri627v0713.9@34.164,87.35
  Bottom w0.254: CON1_hiiri627v0713.9@33.985,86.919 34.163,87.122 34.21,87.132 37.514,87.832 IC1_hiiri627v0713.9@37.757,87.884
RIGHTMB/POTY_hiiri627v0714: CON1_hiiri627v0714.9 IC1_hiiri627v0714.9 | length 6.1
  Bottom w0.15: CON1_hiiri627v0714.9@33.985,110.795 33.985,110.947 CON1_hiiri627v0714.9@34.264,111.226 ; CON1_hiiri627v0714.9@34.164,111.226 CON1_hiiri627v0714.9@34.264,111.226 ; CON1_hiiri627v0714.9@34.264,111.226 35.027,111.226 CON1_hiiri627v0714.9@34.265,111.227
  Bottom w0.254: CON1_hiiri627v0714.9@33.985,110.795 34.163,110.998 34.21,111.008 37.514,111.708 IC1_hiiri627v0714.9@37.757,111.76
RMBPOTY2: U4.12
RMBPOTY2_hiiri627v0711: IC1_hiiri627v0711.11 SV1_hiiri627v0711.8 | length 8.1
  Bottom w0.254: SV1_hiiri627v0711.8@41.529,35.306 42.545,34.036 44.831,34.036 45.339,34.544 45.339,36.068 45.847,36.576 IC1_hiiri627v0711.11@47.079,36.576
RMBPOTY2_hiiri627v0712: IC1_hiiri627v0712.11 SV1_hiiri627v0712.8 | length 8.1
  Bottom w0.254: SV1_hiiri627v0712.8@41.529,60.198 42.545,58.928 44.831,58.928 45.339,59.436 45.339,60.96 45.847,61.468 IC1_hiiri627v0712.11@47.079,61.468
RMBPOTY2_hiiri627v0713: IC1_hiiri627v0713.11 SV1_hiiri627v0713.8 | length 8.1
  Bottom w0.254: SV1_hiiri627v0713.8@41.529,85.344 42.545,84.074 44.831,84.074 45.339,84.582 45.339,86.106 45.847,86.614 IC1_hiiri627v0713.11@47.079,86.614
RMBPOTY2_hiiri627v0714: IC1_hiiri627v0714.11 SV1_hiiri627v0714.8 | length 8.1
  Bottom w0.254: SV1_hiiri627v0714.8@41.529,109.22 42.545,107.95 44.831,107.95 45.339,108.458 45.339,109.982 45.847,110.49 IC1_hiiri627v0714.11@47.079,110.49
RW: DD1.10 DD1.12 DD1.13 U1.7 U2.14 | length 55.3
  Top w0.15: v1(77.394,86.131) 77.394,81.28 78.791,79.883 78.791,78.247 77.76,77.216 U2.14@77.76,71.777 77.76,67.75 78.345,67.164 78.345,65.195 77.809,64.659 77.809,63.077 v1(77.724,62.992) ; v1(77.521,57.577) 78.202,56.896 DD1.13@78.202,53.829 DD1.12@78.852,53.829 78.852,54.661 79.081,54.889 79.923,54.889 80.152,54.661 DD1.10@80.152,53.829 ; v1(77.731,91.915) 79.045,93.229 v1(79.045,95.148)
  Bottom w0.15: v1(77.394,86.131) 77.394,86.15 76.997,86.547 76.997,89.816 77.74,90.56 77.74,91.906 v1(77.731,91.915) ; v1(77.521,57.577) 77.521,62.789 v1(77.724,62.992) ; v1(79.045,95.148) 79.222,95.326 85.243,95.326 85.42,95.148 U1.7@85.42,94.351
S_D0: RN2.4 U1.15 | length 5.4
  Top w0.15: v1(70.936,80.696) RN2.4@70.936,81.675
  Bottom w0.15: U1.15@67.64,79.111 67.64,79.985 67.869,80.213 70.453,80.213 v1(70.936,80.696)
S_D1: RN2.3 U1.16 | length 11
  Top w0.15: U1.16@70.18,79.111 69.139,79.111 69.139,81.518 68.885,81.772 68.792,81.772 68.792,83.922 69.012,84.141 69.723,84.141 69.942,83.922 69.942,82.906 70.4,82.448 71.526,82.448 71.736,82.239 RN2.3@71.736,81.675
S_D2: RN2.2 U1.17 | length 2.6
  Top w0.15: RN2.2@72.536,81.675 72.536,80.305 72.72,80.121 U1.17@72.72,79.111
S_D3: RN2.1 U1.18 | length 4.2
  Top w0.15: v1(73.336,80.696) RN2.1@73.336,81.675
  Bottom w0.15: v1(73.336,80.696) 74.778,80.696 75.26,80.213 U1.18@75.26,79.111
S_D4: RN1.4 U1.19 | length 4.3
  Top w0.15: v1(80.416,80.696) 80.502,80.781 RN1.4@80.502,81.675
  Bottom w0.15: U1.19@77.8,79.111 78.832,79.111 v1(80.416,80.696)
S_D5: RN1.3 U1.20 | length 3.5
  Top w0.15: U1.20@80.34,79.111 81.302,79.111 RN1.3@81.302,81.675
S_D6: RN1.2 U1.21 | length 2.9
  Top w0.15: RN1.2@82.102,81.675 82.102,80.763 82.88,79.985 U1.21@82.88,79.111
S_D7: RN1.1 U1.22 | length 4.8
  Top w0.15: RN1.1@82.902,81.675 82.902,80.42 83.109,80.213 85.141,80.213 85.42,79.934 U1.22@85.42,79.111
SPARE_hiiri627v0711: SV1_hiiri627v0711.9
SPARE_hiiri627v0712: SV1_hiiri627v0712.9
SPARE_hiiri627v0713: SV1_hiiri627v0713.9
SPARE_hiiri627v0714: SV1_hiiri627v0714.9
SWCLK: D4.37 U2.49 U3.3 | length 83.7
  Top w0.15: U2.49@86.06,62.477 86.885,62.477 86.885,61.978 v1(87.623,61.239) ; v1(100.965,59.512) 100.965,60.07 D4.37@101.307,60.07 101.65,60.07 101.65,58.023 101.964,57.709 101.964,54.458 102.38,54.041 106.018,54.041 107.247,55.27 107.247,88.905 v1(106.947,89.205)
  Bottom w0.15: v1(87.623,61.239) 87.623,59.568 89.321,57.87 93.243,57.87 93.65,57.464 94.31,57.464 94.555,57.87 97.13,57.87 97.545,57.455 97.545,56.524 100.787,56.524 101.642,57.379 101.642,59.064 101.194,59.512 v1(100.965,59.512) ; U3.3@95.113,86.672 98.35,86.672 99.62,87.942 99.62,89.002 99.823,89.205 v1(106.947,89.205)
SWDIO: D4.34 U2.46 U3.4 | length 64
  Top w0.15: U2.46@83.26,60.677 83.26,59.63 83.328,59.63 83.328,59.215 v1(83.666,58.877) ; v1(93.04,70.475) 92.634,70.882 92.634,76.022 94.315,77.704 94.315,80.386 94.165,80.386 94.165,82.906 93.098,83.972 90.715,83.972 90.58,84.108 90.58,86.973 91.549,87.942 U3.4@95.113,87.942 ; v1(97.257,62.962) 97.257,60.96 98.171,60.046 98.755,60.046 99.032,59.769 D4.34@99.032,58.796
  Bottom w0.15: v1(83.666,58.877) 83.666,58.867 86.563,58.867 86.995,59.299 86.995,64.211 88.03,65.246 89.997,65.246 90.079,65.329 92.1,65.329 92.431,65.659 92.837,65.659 93.526,66.348 96.135,66.348 97.257,65.227 ; v1(93.04,70.475) 93.04,69.129 93.023,69.129 92.78,68.885 92.78,67.056 93.066,66.77 96.323,66.77 97.257,65.837 97.257,65.227 ; v1(97.257,62.962) 97.257,65.227
T1: D4.26 U2.40 U6.1 | length 81.6
  Top w0.15: v1(64.338,52.645) 63.461,53.522 63.461,73.519 64.011,74.069 64.011,82.191 64.389,82.568 v1(64.389,82.626) ; U2.40@80.26,60.677 80.26,59.588 80.324,59.588 80.324,58.785 81.543,58.785 v1(81.686,58.928) ; v1(85.776,52.4) 85.776,53.238 87.571,55.033 88.841,55.033 90.983,57.175 ; v1(87.274,58.293) 87.274,58.115 88.875,58.115 89.814,57.175 90.983,57.175 ; D4.26@95.032,58.796 95.032,57.709 94.499,57.175 90.983,57.175
  Bottom w0.15: v1(64.338,52.645) 85.531,52.645 v1(85.776,52.4) ; v1(64.389,82.626) 65.314,83.552 U6.1@66.548,83.552 ; v1(81.686,58.928) 81.585,58.928 81.585,58.801 82.093,58.293 v1(87.274,58.293)
T2: D4.27 U2.51 U6.2 | length 80
  Top w0.15: U6.2@66.548,84.822 67.056,84.822 67.285,84.593 67.285,82.956 66.107,81.778 66.107,81.237 65.211,80.342 65.211,64.581 66.111,63.681 66.111,62.586 67.356,61.341 v1(69.875,61.341) ; v1(84.658,63.119) 84.938,63.398 ; 84.977,63.438 85.016,63.477 ; U2.51@86.06,63.477 85.016,63.477 ; v1(93.98,55.982) 94.618,55.982 95.532,56.896 D4.27@95.532,58.796 ; 84.938,63.398 85.016,63.477 ; 84.938,63.398 84.938,63.477 85.016,63.477
  Bottom w0.15: v1(69.875,61.341) 72.472,61.341 73.146,62.015 73.172,62.015 73.452,62.296 75.172,62.296 76.443,63.567 80.492,63.567 83.505,60.554 ; v1(84.658,63.119) 84.954,63.119 85.487,62.586 85.487,60.757 85.284,60.554 83.505,60.554 ; v1(93.98,55.982) 93.565,55.567 87.18,55.567 86.88,55.867 85.471,55.867 85.211,56.127 78.638,56.127 78.396,56.37 78.396,60.35 78.599,60.554 83.505,60.554
T3: U2.52 U6.3 | length 52.1
  Top w0.15: v1(84.379,82.372) 84.379,81.813 85.344,80.848 86.157,80.848 86.716,80.289 86.716,78.537 87.782,77.47 90.221,77.47 91.075,76.615 v1(91.075,64.694) ; U2.52@86.06,63.977 86.97,63.977 87.198,63.748 87.198,62.967 v1(87.757,62.408)
  Bottom w0.15: U6.3@66.548,86.092 67.462,86.092 68.192,85.362 68.192,82.499 68.599,82.093 77.337,82.093 77.616,82.372 v1(84.379,82.372) ; v1(87.757,62.408) 87.503,62.662 87.503,64.211 87.986,64.694 v1(91.075,64.694)
T4: D4.10 U6.4 | length 88.8
  Top w0.15: U6.4@66.548,87.362 65.807,86.62 65.807,81.362 64.911,80.467 64.911,64.456 65.811,63.556 65.811,59.766 66.65,58.928 74.778,58.928 75.794,57.912 v1(75.794,55.785) ; v1(95.532,60.655) 95.532,64.704 95.361,64.875 95.361,65.853 95.532,66.024 D4.10@95.532,66.845
  Bottom w0.15: v1(75.794,55.785) 84.79,55.785 85.173,55.402 86.695,55.402 87.376,54.721 102.413,54.721 103.371,55.679 103.371,60.082 102.799,60.655 v1(95.532,60.655)
T5: D4.11 U6.5 | length 52.3
  Top w0.15: v1(92.71,83.312) 93.167,82.855 93.51,82.855 93.865,82.499 93.865,80.086 94.015,80.086 94.015,78.293 92.329,76.606 92.329,69.901 93.003,69.226 94.081,69.226 95.032,68.275 D4.11@95.032,66.845
  Bottom w0.15: U6.5@66.548,88.632 67.643,88.632 68.492,87.782 68.492,82.906 68.919,82.479 70.561,82.479 71.141,83.058 89.814,83.058 90.542,82.331 91.272,82.331 92.148,83.207 92.605,83.207 v1(92.71,83.312)
T6: D4.12 U6.6 | length 50
  Top w0.15: v1(90.58,83.21) 90.58,81.48 91.999,80.061 91.999,69.494 92.567,68.926 93.881,68.926 94.532,68.275 D4.12@94.532,66.845
  Bottom w0.15: U6.6@66.548,89.902 68.299,89.902 68.792,89.408 68.792,83.312 69.3,82.804 69.672,82.804 70.714,83.845 89.916,83.845 90.551,83.21 v1(90.58,83.21)
V: CON3.1 U4.20 | length 16.4
  Top w0.15: v1@90.82,102.992 90.465,102.992 88.052,105.405 88.052,108.428 88.28,108.657 90.693,108.657 92.852,110.816 94.123,110.816 CON3.1@94.732,111.425
  Bottom w0.15: v1(91.1,102.815) 91.1,103.332 90.961,103.471 U4.20@90.562,103.471 U4.20@91.1,103.471
V2/PGD: U4.14
V2/PGD_hiiri627v0711: IC1_hiiri627v0711.13 SV1_hiiri627v0711.1 | length 11.6
  Top w0.254: SV1_hiiri627v0711.1@44.069,27.686 49.445,33.062 50.08,33.062 v1(50.165,33.147)
  Bottom w0.254: IC1_hiiri627v0711.13@47.333,34.036 49.276,34.036 v1(50.165,33.147)
V2/PGD_hiiri627v0712: IC1_hiiri627v0712.13 SV1_hiiri627v0712.1 | length 11.6
  Top w0.254: SV1_hiiri627v0712.1@44.069,52.578 49.445,57.954 50.08,57.954 v1(50.165,58.039)
  Bottom w0.254: IC1_hiiri627v0712.13@47.333,58.928 49.276,58.928 v1(50.165,58.039)
V2/PGD_hiiri627v0713: IC1_hiiri627v0713.13 SV1_hiiri627v0713.1 | length 11.6
  Top w0.254: SV1_hiiri627v0713.1@44.069,77.724 49.445,83.1 50.08,83.1 v1(50.165,83.185)
  Bottom w0.254: IC1_hiiri627v0713.13@47.333,84.074 49.276,84.074 v1(50.165,83.185)
V2/PGD_hiiri627v0714: IC1_hiiri627v0714.13 SV1_hiiri627v0714.1 | length 11.6
  Top w0.254: SV1_hiiri627v0714.1@44.069,101.6 49.445,106.976 50.08,106.976 v1(50.165,107.061)
  Bottom w0.254: IC1_hiiri627v0714.13@47.333,107.95 49.276,107.95 v1(50.165,107.061)
V_hiiri627v0711: CON1_hiiri627v0711.1 IC1_hiiri627v0711.18 | length 20.4
  Top w0.15: CON1_hiiri627v0711.1@34.163,27.711 35.687,27.711 CON1_hiiri627v0711.1@35.687,27.178
  Top w0.254: CON1_hiiri627v0711.1@33.985,27.28 34.137,27.271 CON1_hiiri627v0711.1@35.687,27.178 ; CON1_hiiri627v0711.1@35.687,27.711 37.224,27.711 38.519,26.416 48.006,26.416 v1(49.276,27.686)
  Bottom w0.254: IC1_hiiri627v0711.18@47.333,27.686 v1(49.276,27.686)
V_hiiri627v0712: CON1_hiiri627v0712.1 IC1_hiiri627v0712.18 | length 20.4
  Top w0.15: CON1_hiiri627v0712.1@34.163,52.603 35.687,52.603 CON1_hiiri627v0712.1@35.687,52.07
  Top w0.254: CON1_hiiri627v0712.1@33.985,52.172 34.137,52.163 CON1_hiiri627v0712.1@35.687,52.07 ; CON1_hiiri627v0712.1@35.687,52.603 37.224,52.603 38.519,51.308 48.006,51.308 v1(49.276,52.578)
  Bottom w0.254: IC1_hiiri627v0712.18@47.333,52.578 v1(49.276,52.578)
V_hiiri627v0713: CON1_hiiri627v0713.1 IC1_hiiri627v0713.18 | length 20.4
  Top w0.15: CON1_hiiri627v0713.1@34.163,77.749 35.687,77.749 CON1_hiiri627v0713.1@35.687,77.216
  Top w0.254: CON1_hiiri627v0713.1@33.985,77.318 34.137,77.309 CON1_hiiri627v0713.1@35.687,77.216 ; CON1_hiiri627v0713.1@35.687,77.749 37.224,77.749 38.519,76.454 48.006,76.454 v1(49.276,77.724)
  Bottom w0.254: IC1_hiiri627v0713.18@47.333,77.724 v1(49.276,77.724)
V_hiiri627v0714: CON1_hiiri627v0714.1 IC1_hiiri627v0714.18 | length 20.4
  Top w0.15: CON1_hiiri627v0714.1@34.163,101.625 35.687,101.625 CON1_hiiri627v0714.1@35.687,101.092
  Top w0.254: CON1_hiiri627v0714.1@33.985,101.194 34.137,101.185 CON1_hiiri627v0714.1@35.687,101.092 ; CON1_hiiri627v0714.1@35.687,101.625 37.224,101.625 38.519,100.33 48.006,100.33 v1(49.276,101.6)
  Bottom w0.254: IC1_hiiri627v0714.18@47.333,101.6 v1(49.276,101.6)
VCC: 100n.1 C1_hiiri627v0711.1 C1_hiiri627v0712.1 C1_hiiri627v0713.1 C1_hiiri627v0714.1 C2.1 CON1_hiiri627v0711.7 CON1_hiiri627v0712.7 CON1_hiiri627v0713.7 CON1_hiiri627v0714.7 CON2_hiiri627v0711.4 CON2_hiiri627v0712.4 CON2_hiiri627v0713.4 CON2_hiiri627v0714.4 CON3.7 CON4.4 DD1.14 IC1_hiiri627v0711.14 IC1_hiiri627v0712.14 IC1_hiiri627v0713.14 IC1_hiiri627v0714.14 R5.1 R15.1 SV1_hiiri627v0711.4 SV1_hiiri627v0712.4 SV1_hiiri627v0713.4 SV1_hiiri627v0714.4 U1.25 U3.2 U4.15 | length 225.5
  Top w0.15: v1(77.552,52.07) DD1.14@77.552,53.829 ; v1(87.012,50.394) R15.1@87.012,52.572 ; v1(91.44,83.312) 91.44,83.097 93.04,81.497 100n.1@93.04,81.397 U1.25@93.04,79.111 ; R5.1@98.253,83.872 98.253,84.74 v1(98.527,85.014)
  Bottom w0.15: CON1_hiiri627v0711.7@33.985,31.394 33.604,31.394 33.604,31.826 CON1_hiiri627v0711.7@34.164,31.826 ; CON1_hiiri627v0712.7@33.985,56.286 33.782,56.286 33.782,56.718 CON1_hiiri627v0712.7@34.164,56.718 ; CON1_hiiri627v0713.7@33.985,81.432 33.782,81.432 33.782,81.864 CON1_hiiri627v0713.7@34.164,81.864 ; CON1_hiiri627v0714.7@33.985,105.308 33.782,105.308 33.782,105.74 CON1_hiiri627v0714.7@34.164,105.74 ; 54.245,102.413 C1_hiiri627v0714.1@54.245,103.251 ; C2.1@75.412,111.984 75.412,111.832 75.428,111.832 CON4.4@75.428,109.826 81.127,104.127 81.127,103.308 82.264,102.171 83.852,102.171 88.402,106.721 U4.15@90.562,106.721 91.836,106.721 92.426,107.31 CON3.7@94.732,107.31 ; v1(87.012,50.394) 78.365,50.394 77.552,51.206 v1(77.552,52.07) 76.403,50.921 65.249,50.921 63.241,52.929 63.241,53.103 62.382,53.962 62.382,74.066 63.352,75.036 64.089,75.036 64.287,75.235 66.37,75.235 69.266,78.13 79.892,78.13 80.521,77.502 82.308,77.502 82.683,77.876 92.685,77.876 93.04,78.232 U1.25@93.04,79.111 ; v1(91.44,83.312) 93.53,85.402 U3.2@95.113,85.402 98.138,85.402 v1(98.527,85.014)
  Bottom w0.254: CON1_hiiri627v0711.7@33.985,31.394 33.985,31.318 33.909,31.242 36.195,31.242 36.703,30.861 39.749,30.861 40.384,30.226 SV1_hiiri627v0711.4@41.529,30.226 42.799,31.496 44.577,31.496 46.101,32.766 IC1_hiiri627v0711.14@47.079,32.766 48.641,32.766 49.403,32.004 50.673,32.004 53.311,29.366 CON2_hiiri627v0711.4@53.476,29.366 54.2,29.366 54.229,29.337 C1_hiiri627v0711.1@54.245,29.337 ; CON1_hiiri627v0713.7@33.985,81.432 33.985,81.356 33.909,81.28 36.195,81.28 36.703,80.899 39.749,80.899 40.384,80.264 SV1_hiiri627v0713.4@41.529,80.264 42.799,81.534 44.577,81.534 46.101,82.804 IC1_hiiri627v0713.14@47.079,82.804 48.641,82.804 49.403,82.042 50.673,82.042 53.311,79.404 CON2_hiiri627v0713.4@53.476,79.404 54.2,79.404 54.229,79.375 C1_hiiri627v0713.1@54.245,79.375 ; CON1_hiiri627v0714.7@33.985,105.308 33.985,105.232 33.909,105.156 36.195,105.156 36.703,104.775 39.749,104.775 40.384,104.14 SV1_hiiri627v0714.4@41.529,104.14 42.799,105.41 44.577,105.41 46.101,106.68 IC1_hiiri627v0714.14@47.079,106.68 48.641,106.68 49.403,105.918 50.673,105.918 53.311,103.28 CON2_hiiri627v0714.4@53.476,103.28 54.2,103.28 54.229,103.251 C1_hiiri627v0714.1@54.245,103.251 ; CON1_hiiri627v0712.7@34.164,56.718 34.887,55.995 36.41,55.995 36.5,55.905 36.703,55.753 39.749,55.753 40.384,55.118 SV1_hiiri627v0712.4@41.529,55.118 42.681,55.118 43.888,56.325 45.237,56.325 46.571,57.658 IC1_hiiri627v0712.14@47.079,57.658 48.723,57.658 48.969,57.412 50.322,57.412 CON2_hiiri627v0712.4@53.476,54.258 54.2,54.258 54.229,54.229 C1_hiiri627v0712.1@54.245,54.229 ; CON2_hiiri627v0712.4@53.582,54.364 C1_hiiri627v0712.1@53.689,54.258
VDDA: R2.1 R7.2 U2.13 | length 21.3
  Top w0.15: R7.2@70.453,60.147 71.316,59.284 73.159,59.284 76.18,62.305 77.85,62.305 78.105,62.56 78.645,63.1 78.645,67.289 78.34,67.593 78.34,71.696 U2.13@78.26,71.777 ; R2.1@70.453,62.477 70.453,61.322 70.459,61.322 R7.2@70.459,60.198
VIN: R9.2 R10.1 U2.20 U5.8 | length 62.3
  Top w0.15: R10.1@72.502,73.737 71.793,73.027 71.793,71.748 71.399,71.354 71.399,70.789 73.228,68.961 v1@73.228,68.477 ; v1(73.228,68.224) 73.842,68.224 U2.20@74.094,68.477 ; v1(90.627,53.019) 91.316,53.708 U5.8@92.075,53.708
  Bottom w0.15: R9.2@78.708,69.17 78.708,66.803 77.07,65.165 76.346,65.165 73.286,68.224 v1(73.228,68.224) 72.746,68.224 71.808,69.162 70.817,69.162 70.691,69.289 69.34,69.289 66.659,66.608 66.659,56.997 69.046,54.61 71.222,54.61 72.813,53.019 v1(90.627,53.019)
VQ: CON3.3 U4.19 | length 8.2
  Top w0.15: v1(91.989,102.738) 91.989,105.38 92.547,105.939 CON3.3@94.732,105.939
  Bottom w0.15: U4.19@90.562,104.121 91.673,104.121 91.989,103.805 v1(91.989,102.738)
VQ2/PGC: U4.13
VQ2/PGC_hiiri627v0711: IC1_hiiri627v0711.12 SV1_hiiri627v0711.5 | length 5
  Bottom w0.254: SV1_hiiri627v0711.5@44.069,32.766 44.831,32.766 45.847,33.782 45.847,35.306 IC1_hiiri627v0711.12@47.079,35.306
VQ2/PGC_hiiri627v0712: IC1_hiiri627v0712.12 SV1_hiiri627v0712.5 | length 5
  Bottom w0.254: SV1_hiiri627v0712.5@44.069,57.658 44.831,57.658 45.847,58.674 45.847,60.198 IC1_hiiri627v0712.12@47.079,60.198
VQ2/PGC_hiiri627v0713: IC1_hiiri627v0713.12 SV1_hiiri627v0713.5 | length 5
  Bottom w0.254: SV1_hiiri627v0713.5@44.069,82.804 44.831,82.804 45.847,83.82 45.847,85.344 IC1_hiiri627v0713.12@47.079,85.344
VQ2/PGC_hiiri627v0714: IC1_hiiri627v0714.12 SV1_hiiri627v0714.5 | length 5
  Bottom w0.254: SV1_hiiri627v0714.5@44.069,106.68 44.831,106.68 45.847,107.696 45.847,109.22 IC1_hiiri627v0714.12@47.079,109.22
VQ_hiiri627v0711: CON1_hiiri627v0711.3 IC1_hiiri627v0711.17 | length 17.2
  Top w0.15: CON1_hiiri627v0711.3@33.985,32.766 33.985,33.198 CON1_hiiri627v0711.3@34.163,33.198
  Top w0.254: CON1_hiiri627v0711.3@33.985,32.766 CON1_hiiri627v0711.3@35.687,32.766 ; CON1_hiiri627v0711.3@34.163,33.198 36.294,33.198 39.285,30.207 39.285,29.816 v1(39.37,29.731)
  Bottom w0.254: v1(39.37,29.731) 39.992,29.731 40.767,28.956 IC1_hiiri627v0711.17@47.079,28.956
VQ_hiiri627v0712: CON1_hiiri627v0712.3 IC1_hiiri627v0712.17 | length 17.2
  Top w0.15: CON1_hiiri627v0712.3@33.985,57.658 33.985,58.09 CON1_hiiri627v0712.3@34.163,58.09
  Top w0.254: CON1_hiiri627v0712.3@33.985,57.658 CON1_hiiri627v0712.3@35.687,57.658 ; CON1_hiiri627v0712.3@34.163,58.09 36.294,58.09 39.285,55.099 39.285,54.708 v1(39.37,54.623)
  Bottom w0.254: v1(39.37,54.623) 39.992,54.623 40.767,53.848 IC1_hiiri627v0712.17@47.079,53.848
VQ_hiiri627v0713: CON1_hiiri627v0713.3 IC1_hiiri627v0713.17 | length 17.2
  Top w0.15: CON1_hiiri627v0713.3@33.985,82.804 33.985,83.236 CON1_hiiri627v0713.3@34.163,83.236
  Top w0.254: CON1_hiiri627v0713.3@33.985,82.804 CON1_hiiri627v0713.3@35.687,82.804 ; CON1_hiiri627v0713.3@34.163,83.236 36.294,83.236 39.285,80.245 39.285,79.854 v1(39.37,79.769)
  Bottom w0.254: v1(39.37,79.769) 39.992,79.769 40.767,78.994 IC1_hiiri627v0713.17@47.079,78.994
VQ_hiiri627v0714: CON1_hiiri627v0714.3 IC1_hiiri627v0714.17 | length 17.2
  Top w0.15: CON1_hiiri627v0714.3@33.985,106.68 33.985,107.112 CON1_hiiri627v0714.3@34.163,107.112
  Top w0.254: CON1_hiiri627v0714.3@33.985,106.68 CON1_hiiri627v0714.3@35.687,106.68 ; CON1_hiiri627v0714.3@34.163,107.112 36.294,107.112 39.285,104.121 39.285,103.73 v1(39.37,103.645)
  Bottom w0.254: v1(39.37,103.645) 39.992,103.645 40.767,102.87 IC1_hiiri627v0714.17@47.079,102.87
pads on no net: CON2_hiiri627v0711.2 CON2_hiiri627v0711.6 CON2_hiiri627v0712.2 CON2_hiiri627v0712.6 CON2_hiiri627v0713.2 CON2_hiiri627v0713.6 CON2_hiiri627v0714.2 CON2_hiiri627v0714.6 CON4.2 CON4.6 D4.2 D4.3 D4.4 D4.13 D4.14 D4.17 D4.28 D4.31 D4.38 U1.1 U1.2 U1.3 U1.4 U2.2 U2.3 U2.16 U2.29 U2.30 U2.33 U2.34 U2.35 U2.36 U2.42 U2.43 U2.44 U2.45 U2.50 U2.53 U2.54 U2.57 U2.58 U2.59 U3.1

## Polygon pours and split planes (outlines as drawn)
GND on Top "GND_L01_P001" (solid, pour order 1): 16.148,153.125 16.402,153.379 122.828,153.379 122.828,14.695 122.32,14.187 16.656,14.187
GND on Bottom "GND_L02_P000" (solid, pour order 0): 16.002,153.416 16.256,153.67 122.682,153.67 122.682,14.986 122.174,14.478 16.51,14.478

## Keep-outs
Keep-Out Layer:
  the board outline again, w0.254